# Altium PCB HW_ADHERENT_LANECTRL_R1.PcbDoc (part 2 of 2)
Units mm, origin at the board's own origin, x right, y up, seen from the top; angles counter-clockwise.
Board outline 504 x 60 mm, 4 copper layers (Top Layer, Int1 (GND), Int2 (PWR), Bottom Layer), stack 1.541 mm thick; 223 components, 129 nets, 646 pads, 0 vias.
Unrouted connection lines stored in the file: 353.
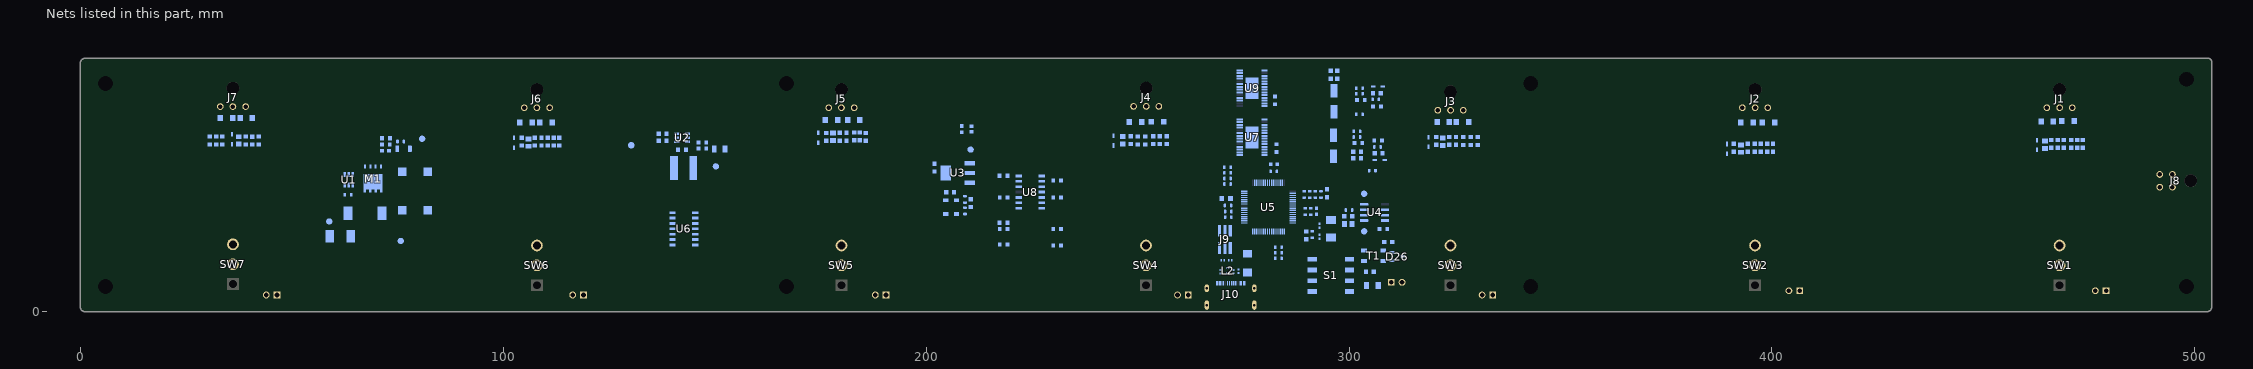
[diagram p2: the nets of this part, all layers, seen from the top]

## Part data
B1: manufacturer=MURATA, Manufacturer Part Name=BLM18PG121SN1D, Package Reference=F1206, Code=3030007, Family=BEAD, Supplier=Digikey, Supplier No=490-1037-2-ND
C1 C2 C3 C4 C5 C6 C7 C8 C9 C10 C11 C12 C13 C14 C29: library part CAP0603_100nF_50V, "0.1 µF ±10% 50V Ceramic Capacitor X7R 0603 (1608 Metric)", Manufacturer Name=KEMET, Manufacturer Part Number=C0603C104K5RAC7867, Datasheet Link=https://componentsearchengine.com/Datasheets/1/06031A100FAT2A.pdf, Height=0.9mm
C15 C16: library part EEEFT1H221AV, "220 µF 50 V Aluminum Electrolytic Capacitors Radial, Can - SMD 180mOhm @ 100kHz 2000 Hrs @ 105°C", Manufacturer Part Number=EEE-FT1H221AV, Package="RADIAL-2 Panasonic", Availability="In Stock", Check_prices=https://www.snapeda.com/parts/EEE-FT1H221AV/Panasonic/view-part/5517810/?ref=eda, MF="Panasonic Electronic Components", price=None, SnapEDA_Link=https://www.snapeda.com/parts/EEE-FT1H221AV/Panasonic/view-part/5517810/?ref=snap
C17: library part CAP0603_0.22UF_50V, "0.22 µF ±10% 50V Ceramic Capacitor X7R 0603 (1608 Metric)", Manufacturer Part Number=GCM188R71H224KA64D, Order Code="DIGI: 490-5402-2-ND"
C18: library part CAP1206_10UF_50V, "10 µF ±10% 50V Ceramic Capacitor X5R 1206 (3216 Metric)", LCSC Manufacturer Part Number=CL31A106KBHNNNE, LCSC Part Number=C13585, Manufacturer Part Number=CL31A106KBHNNNE, Order Code="Digi: 1276-2876-2-ND"
C19: library part CAP0603_0.1UF_50V_2, "0.1 µF ±10% 50V Ceramic Capacitor X7R 0603 (1608 Metric)", LCSC Manufacturer Part Number=CL10B104KB8NNNC, LCSC Part Number=C1591, Manufacturer Part Number=CL10B104KB8NNNL, Order Code=DIGI:1276-CL10B104KB8NNNLTR-ND, Sirius Stock Code=A063-AGC10300001226
C20 C27 C39 C47 C52: library part CAP0603_100nF, "0.1 µF ±10% 50V Ceramic Capacitor X7R 0603 (1608 Metric)", LCSC Part Number=C1590, Manufacturer Part Number=CL10B104KA8NNNC
C21: library part C0603C104M4RACTU, "0.1 µF ±20% 16V Ceramic Capacitor X7R 0603 (1608 Metric)", Manifacturer=KEMET, Supplier="Digi; 399-C0603C104M4RACTUDKR-ND"
C22: library part MSASU168SB5105MTNA01, "CAP CER 1UF 50V X5R 0603", manufacturer="Taiyo Yuden", Supplier=587-MSASU168SB5105MTNA01DKR-ND
C23: library part GRM188R72A104KA35D, "CAP CER 0.1UF 100V X7R 0603", Manifacturer="Murata Electronics", Supplier="Digi; 490-3285-6-ND"
C24: library part CAP1206_22uF_35V, "22 µF ±20% 35V Ceramic Capacitor X5R 1206 (3216 Metric)", Manufacturer Part Number=C3216X5R1V226M160AC, Order Code="DIGI : 445-180362-1-ND"
C25 C26: library part CAP0603_10uF_25V, "10 µF ±10% 25V Ceramic Capacitor X5R 0603 (1608 Metric)", Manufacturer Part Number=GRM188R61E106KA73J, Order Code="Digi; 490-GRM188R61E106KA73JDKR-ND"
C28: library part CAP0603_10UF_10V, "10 µF ±10% 10V Ceramic Capacitor X5R 0603 (1608 Metric)", LCSC Manufacturer Part Number=CL10A106KP8NNNC, LCSC Part Number=C19702, Manufacturer Part Number=CL10A106KP8NNNC, Order Code="DIGI: 1276-1192-2-ND"
C30 C31: library part CAP0603_100PF, "100 pF ±5% 50V Ceramic Capacitor C0G, NP0 0603 (1608 Metric)", LCSC Part Number=C14858, Manufacturer Part Number=CL10C101JB8NNNC
C32: library part CAP0603_4.7uF_10V, "4.7 µF ±20% 10V Ceramic Capacitor X5R 0603 (1608 Metric)", Manufacturer Name="Murata Electronics", Manufacturer Part Number=GRM185R61A475ME11D, Datasheet Link=https://componentsearchengine.com/Datasheets/1/06031A100FAT2A.pdf, Height=0.9mm
C33 C34 C35 C36 C40 C41: library part CAP0603_1UF_16V, "1 µF ±10% 16V Ceramic Capacitor X7R 0603 (1608 Metric)", Manufacturer Part Number=CGA3E1X7R1C105K080AC, Order Code="DIGI: 445-12539-2-ND"
C37 C38: library part GMC04CG8R2J25NT, "CAP0402 COG 8.2PF 5% 25V", Manifacturer="Cal-Chip Electronics, Inc.", Supplier="Digi; 4713-GMC04CG8R2J25NTDKR-ND"
C42: library part CAP0402_0.1UF_50V_1, "0.1 µF ±10% 50V Ceramic Capacitor X7R 0402 (1005 Metric)", Manufacturer Part Number=GCM155R71H104KE02J, Order Code="DIGI: 490-14514-2-ND"
C43 C49: "22 µF 50 V Aluminum - Polymer Capacitors Radial, Can - SMD 80mOhm 10000 Hrs @ 105°C", manufacturer="Panasonic Industry", MPN=EEH-ZA1H220P
C44 C45 C50 C51: library part CAP0603_100nF_1, "CAP CER 0.1UF 50V X7R 0603", Order Code="DIGI : 399-5089-1-ND", P/N=C0603C104K5RACTU
C46 C48: library part CAP0603_0.1uF_10V, "0.1 µF ±10% 10V Ceramic Capacitor X7R 0603 (1608 Metric)", Arrow Part Number=0603ZC104KAT2A, Manufacturer Name=AVX, Mouser Part Number=581-0603ZC104K, Arrow Price/Stock=https://www.arrow.com/en/products/0603zc104kat2a/avx, Datasheet Link=https://componentsearchengine.com/Datasheets/1/06031A100FAT2A.pdf, Height=0.9mm, Manufacturer Part Number=0603ZC104KAT2A, Mouser Price/Stock=https://www.mouser.co.uk/ProductDetail/AVX/0603ZC104KAT2A?qs=pf7pOjfHGZYfu9op9dQPDA%3D%3D
D1 D3 D7 D8 D13 D14 D19 D39 D40: "Diode 30 V 100mA Surface Mount SOD-323", MPN=BAT54WS-7-F, Supplier=C124205
D2 D4 D5 D6 D9 D10 D11 D12 D15 D16 D17 D18 D20 D21: "53.3V Clamp 3.8A Ipp Tvs Diode Surface Mount SOD-123F", manufacturer="Littelfuse Inc.", MPN=SMF33A
D22: "38.9V Clamp 77.1A Ipp Tvs Diode Surface Mount DO-214AB (SMCJ)", manufacturer="Littelfuse Inc.", MPN=SMDJ24CA
D23 D24: "Diode 20 V 500mA Surface Mount SOD-123"
D25: library part LED_1, "LED RED CLEAR SMD", manufacturer="Lite-On Inc.", Supplier Part Number=160-1447-1-ND, Manufacturer Part Number=LTST-C191KRKT
D26: library part SM24CANB-02HTG_TVS, "TVS DIODE 24VWM 50VC SOT23-3", LCSC Manufacturer Part Number=SM24CANB-02HTG, LCSC Part Number=C151237, Manufacturer Part Number=SM24CANB-02HTG, Order Code="DIGI : F6707CT-ND"
D27: library part LED0805_GREEN, "Green 570nm LED Indication - Discrete 2.1V 0805 (2012 Metric)", Color=Red, manufacturer="Everlight Electronics Co Ltd", Manufacturer Part Number=QTLP630C4TR, componentlink1description="Manufacturer URL", componentlink1url=http://www.we-online.com, componentlink2description=Datasheet, componentlink2url=http://katalog.we-online.com/led/datasheet/150080RS75000.pdf, PackageReference=0805_A
D28: library part LTST-C191KSKT, "Yellow 591nm LED Indication - Discrete 2.1V 0603 (1608 Metric)", Color="Yellow Clear", Manufacturer Part Number=LTST-C191KSKT, Order Code="DIGI: 160-1448-2-ND"
D36: "9.2V Clamp 43.5A Ipp Tvs Diode Surface Mount DO-214AC (SMA)", manufacturer="Littelfuse Inc.", MPN=SMAJ5.0A
D37 D38: library part RF2945-000, "10V (Typ) Clamp 2A (8/20µs) Ipp Tvs Diode Surface Mount 0402", Manufacturer Part Number=SESD0402X1BN-0010-098, Order Code="DIGI: SESD0402X1BN-0010-098TR-ND"
F1: "FUSE BRD MNT 5A 125VAC/VDC 2SMD", manufacturer=Littelfuse, Supplier="Digi; F2607DKR-ND"
FB1: "120 Ohms @ 100 MHz 1 Power Line Ferrite Bead 0805 (2012 Metric) 3A 30mOhm", MPN=BLM21PG121SN1D, Supplier="Digi; 490-5986-6-ND"
J1 J2 J3 J4 J5 J6 J7: "Micro-Fit 3.0 Right-Angle Header, 3.00mm Pitch, Single Row, 3 Circuits, with Snap-in Plastic Peg PCB Lock, Tin, Glow-Wire Capable, Black", Manufacturer Part Number=436500300, Supplier="Digi; WM1861-ND"
J8: "Connector Header Through Hole, Right Angle 4 position 0.118\" (3.00mm)", manufacturer=MOLEX, Manufacturer Part Number=0430450400, Supplier="Digi; WM1814-ND"
J9: "Connector Header Surface Mount 6 position 0.050\" (1.27mm)", manufacturer="Samtec Inc.", Supplier=SAM13919DKR-ND
J10: library part USB4510-03-1-A_REVA, "USB-C (USB TYPE-C) USB 2.0 Receptacle Connector 24 (16+8 Dummy) Position Board Edge, Cutout; Surface Mount; Through Hole, Right Angle", Manufacturer Part Number=USB4510-03-1-A, Order Code="DIGI: 2073-USB4510-03-1-ATR-ND"
L1: library part 74404064180, "18 µH Semi-Shielded Drum Core, Wirewound Inductor 2.2 A 81mOhm Nonstandard", Supplier=732-5553-6-ND
L2: library part MCZ1210AH900L2T, "2 Line Common Mode Choke Surface Mount 90 Ohms @ 100 MHz 100mA DCR 1.75Ohm", LCSC Manufacturer Part Number=MCZ1210AH900L2TD0G, LCSC Part Number=C435268, Manufacturer Part Number=MCZ1210AH900L2TA0G, Order Code="Digi: 445-MCZ1210AH900L2TA0GTR-ND"
LEDS1 LEDS2 LEDS3 LEDS4 LEDS5 LEDS6 LEDS7 P1: library part "Header 2", "CONN HEADER VERT 2POS 2.54MM", manufacturer=Molex, Supplier Part Number=WM4000-ND, Manufacturer Part Number=0022032021
M1: "MOSFET'ler N-Ch 60V 100A TDSON-8 OptiMOS 3"
MTG1 MTG2 MTG3 MTG4 MTG5 MTG6 MTG7 MTG8: library part MTG3MM_8
R1 R2 R3 R4 R11 R12 R13 R14 R21 R22 R23 R24 R27 R32: library part 0603WAF1002T5E, "Thick Film Resistors - SMD 0603 100 mW (1/10 W) 1% 10K", manufacturer="UNI-ROYAL(Uniroyal Elec)", Supplier_JLCPCB=C25804, Supplier_MOUSER=303-0603WAF1002T5E
R5 R6 R15 R16 R25 R26 R33: library part 0603WAF1003T5E, "-55℃~+155℃ 100kΩ 100mW 75V Thick Film Resistor ±1% ±100ppm/℃ 0603 Chip Resistor - Surface Mount ROHS", manufacturer="UNI-ROYAL(Uniroyal Elec)", Supplier_JLCPCB=C25803, Supplier_MOUSER=303-0603WAF1003T5E
R7 R9 R17 R20 R28 R30 R34: library part 0603WAF1502T5E, "-55℃~+155℃ 100mW 15kΩ 75V Thick Film Resistor ±1% ±100ppm/℃ 0603 Chip Resistor - Surface Mount ROHS", JLCPCB PART 3=C22809, manufacturer="UNI-ROYAL(Uniroyal Elec)", Mouser Part Number=303-0603WAF1502T5E
R8 R10 R18 R19 R29 R31 R35: library part 0805W8F1002T5E, "-55℃~+155℃ 10kΩ 125mW 150V Thick Film Resistor ±1% ±100ppm/℃ 0805 Chip Resistor - Surface Mount ROHS", JLCPCB PART#=C17414, manufacturer="UNI-ROYAL(Uniroyal Elec)"
R36: library part CMP-2100-03662-2, "RES SMD 100K OHM 1% 1/10W 0603", Case Code (Imperial)=0603, Case Code (Metric)=1608, Max Operating Temperature=155°C, Max Power Dissipation=100mW, Min Operating Temperature=-55°C, Resistance=100kR, Resistance Tolerance=1%, Resistor Type="Thick Film", Temperature Coefficient=100ppm/°C, Voltage Rating=50V, Working Voltage=75V, Case/Package=0603, Construction=Rectangular, Depth=0.8mm, Features="Moisture Resistant", Height=0.45mm, Lead Free="Lead Free", Length=1.6mm, Military Standard=Not, Number of Pins=2, Number of Terminations=2, packaging="Tape and Reel", Power Rating=100mW, REACH SVHC="No SVHC", RoHS Compliant=Yes, series=RC, Technology="THICK FILM", Termination=SMD/SMT, Tolerance=1%, Voltage Rating (DC)=50V, Width=0.8mm
R37 R44 R59 R66 R67 R70 R73 R76 R77 R78 R79: library part RES0603_10K_%1_1, "10 kOhms ±1% 0.125W, 1/8W Chip Resistor 0603 (1608 Metric) Anti-Sulfur Thin Film", LCSC Manufacturer Part Number=MCT06030C1002FP500, LCSC Part Number=C161803, Manufacturer Part Number=RNCP0603FTD10K0, Order Code="Digi: RNCP0603FTD10K0TR-ND"
R38: library part CRCW060388K7FKEA, "88.7 kOhms ±1% 0.125W, 1/8W Chip Resistor 0603 (1608 Metric) Automotive AEC-Q200 Thick Film"
R39: library part RC0603FR-0722K1L, "22.1 kOhms ±1% 0.1W, 1/10W Chip Resistor 0603 (1608 Metric) Moisture Resistant Thick Film"
R40: library part RES0603_22K_%1, "10 kOhms ±1% 0.1W, 1/10W Chip Resistor 0603 (1608 Metric) Moisture Resistant Thick Film", LCSC Manufacturer Part Number=RC0603FR-0722KL, LCSC Part Number=C114065, Manufacturer Part Number=RC0603FR-0722KL, Order Code="Digi: 311-22.0KHRTR-ND"
R41: library part RES0603_33K_%1, "33 kOhms ±1% 0.1W, 1/10W Chip Resistor 0603 (1608 Metric) Moisture Resistant Thick Film", LCSC Manufacturer Part Number=RC0603FR-0733KL, LCSC Part Number=C126359, Manufacturer Part Number=RC0603FR-0733KL, Order Code="Digi: 311-33.0KHRTR-ND"
R42: library part CRGH0603F330R, "RES SMD 330 OHM 1% 1/5W 0603", Device Package="0603 (1608 Metric)", manufacturer="TE Connectivity Passive Product", Operating Temperature="-55°C ~ 155°C", Power (Watts)="0.2W, 1/5W", Supplier Device Package=0603, Supplier Part Number 1=A129541CT-ND, Temperature Coefficient=±100ppm/°C, Tolerance=±1%, componentlink1description=Datasheet, componentlink1url=https://www.te.com/commerce/DocumentDelivery/DDEController?Action=srchrtrv&DocNm=1773204-1&DocType=DS&DocLang=English, componentlink2description="DigiKey Link", componentlink2url=https://www.digikey.com/en/products/detail/te-connectivity-passive-product/CRGH0603F330R/5586961, Composition="Thick Film", Height - Seated (Max)="0.022\" (0.55mm)", lastupdated="2/9/2024 8:43:33 PM", Lifecycle Status=Active, Minimum Order=1, Number of Terminations=2, Package / Case="0603 (1608 Metric)", packaging=TapeAndReel, Part Number=CRGH0603F330R, Part Status=Active, partid=5733, price=0.01, Resistance="330 Ohms", series="CRGH, Neohm", Size / Dimension="0.063\" L x 0.031\" W (1.60mm x 0.80mm)", Supplier 1=DigiKey
R43: library part AC1206FR-07120RL, "RES SMD 120 OHM 1% 1/4W 1206", Device Package="1206 (3216 Metric)", manufacturer=Yageo, Operating Temperature="-55°C ~ 155°C", Power (Watts)="0.25W, 1/4W", Ratings=AEC-Q200, Supplier Device Package=1206, Supplier Part Number 1=YAG3810CT-ND, Temperature Coefficient=±100ppm/°C, Tolerance=±1%, componentlink1description=Datasheet, componentlink1url=https://www.yageo.com/upload/media/product/productsearch/datasheet/rchip/PYu-AC_51_RoHS_L_7.pdf, componentlink2description="DigiKey Link", componentlink2url=https://www.digikey.com/en/products/detail/yageo/AC1206FR-07120RL/5897228, Composition="Thick Film", Features="Automotive AEC-Q200, Moisture Resistant", Height - Seated (Max)="0.026\" (0.65mm)", lastupdated="2/9/2024 8:54:27 PM", Lifecycle Status=Active, Minimum Order=1, Number of Terminations=2, Package / Case="1206 (3216 Metric)", packaging=TapeAndReel, Part Number=AC1206FR-07120RL, Part Status=Active, partid=31141, price=0.01, Resistance="120 Ohms", series=AC, Size / Dimension="0.122\" L x 0.063\" W (3.10mm x 1.60mm)", Supplier 1=DigiKey
R45 R46 R47: library part RES0603_10K_%1, "10 kOhms ±1% 0.1W, 1/10W Chip Resistor 0603 (1608 Metric) Moisture Resistant Thick Film", LCSC Manufacturer Part Number=RC0603FR-0710KL, LCSC Part Number=C98220, Manufacturer Part Number=RC0603FR-0710KL, Order Code="Digi: 311-10.0KHRTR-ND"
R48 R49: library part Res3_9, "RES SMD 1K OHM 1% 1/10W 0603", Case Code (Imperial)=0603, Case Code (Metric)=1608, manufacturer=Yageo, Manufacturer Part Number=RC0603FR-071KL, Max Operating Temperature=155°C, Max Power Dissipation=100mW, Min Operating Temperature=-55°C, Resistance=1kR, Resistance Tolerance=1%, Resistor Type="Thick Film", Supplier Part Number 1=311-1.00KHRCT-ND, Temperature Coefficient=100ppm/°C, Voltage Rating=50V, Case/Package=0603, Category="Chip SMD Resistors", componentlink1description=https://datasheet.ciiva.com/11819/0900766b80c66297-11819477.pdf?src-supplier=RSComponents, componentlink1url=https://datasheet.ciiva.com/11819/0900766b80c66297-11819477.pdf?src-supplier=RSComponents, componentlink2description=https://datasheet.ciiva.com/12666/pyu-rc0402-51-rohs-l-6-r-12666741.pdf?src-supplier=Mouser, componentlink2url=https://datasheet.ciiva.com/12666/pyu-rc0402-51-rohs-l-6-r-12666741.pdf?src-supplier=Mouser, ComponentLink3Description=https://datasheet.ciiva.com/17063/pyu-rc0402-51-rohs-l-6-r-17063193.pdf?src-supplier=Future+Electronics, ComponentLink3URL=https://datasheet.ciiva.com/17063/pyu-rc0402-51-rohs-l-6-r-17063193.pdf?src-supplier=Future+Electronics, ComponentLink4Description=https://datasheet.ciiva.com/22747/1018594-22747513.pdf?src-supplier=Element14, ComponentLink4URL=https://datasheet.ciiva.com/22747/1018594-22747513.pdf?src-supplier=Element14, ComponentLink5Description=https://datasheet.ciiva.com/7849/1018594-7849869.pdf?src-supplier=Element14, ComponentLink5URL=https://datasheet.ciiva.com/7849/1018594-7849869.pdf?src-supplier=Element14, ComponentLink6Description=https://datasheet.ciiva.com/7983/1018594-7983502.pdf?src-supplier=Element14, ComponentLink6URL=https://datasheet.ciiva.com/7983/1018594-7983502.pdf?src-supplier=Element14, ComponentLink7Description=https://datasheet.ciiva.com/7849/1018594-7849871.pdf?src-supplier=Element14, ComponentLink7URL=https://datasheet.ciiva.com/7849/1018594-7849871.pdf?src-supplier=Element14, ComponentLink8Description=https://datasheet.ciiva.com/11808/0900766b80c66297-11808195.pdf?src-supplier=RSComponents, ComponentLink8URL=https://datasheet.ciiva.com/11808/0900766b80c66297-11808195.pdf?src-supplier=RSComponents, ComponentLink9Description=https://datasheet.ciiva.com/2452/pyu-rc0402-51-rohs-l-6-2452608.pdf?src-supplier=Digi-Key, ComponentLink9URL=https://datasheet.ciiva.com/2452/pyu-rc0402-51-rohs-l-6-2452608.pdf?src-supplier=Digi-Key, ComponentLink10Description=https://datasheet.ciiva.com/2452/pyu-r-int-thick-7-2452609.pdf?src-supplier=Digi-Key, ComponentLink10URL=https://datasheet.ciiva.com/2452/pyu-r-int-thick-7-2452609.pdf?src-supplier=Digi-Key, ComponentLink11Description=https://datasheet.ciiva.com/2452/pyu-r-int-thick-7-2452610.pdf?src-supplier=Digi-Key, ComponentLink11URL=https://datasheet.ciiva.com/2452/pyu-r-int-thick-7-2452610.pdf?src-supplier=Digi-Key, ComponentLink12Description=https://datasheet.ciiva.com/28386/pyu-rc0402-51-rohs-l-6-28386633.pdf?src-supplier=Avnet+Europe, ComponentLink12URL=https://datasheet.ciiva.com/28386/pyu-rc0402-51-rohs-l-6-28386633.pdf?src-supplier=Avnet+Europe, ComponentLink13Description=https://datasheet.ciiva.com/22747/1018594-22747515.pdf?src-supplier=Element14, ComponentLink13URL=https://datasheet.ciiva.com/22747/1018594-22747515.pdf?src-supplier=Element14, ComponentLink14Description=https://datasheet.ciiva.com/7983/1018594-7983535.pdf?src-supplier=Element14, ComponentLink14URL=https://datasheet.ciiva.com/7983/1018594-7983535.pdf?src-supplier=Element14, ComponentLink15Description=https://datasheet.ciiva.com/8896/pyu-rc0402-51-rohs-l-6-8896201.pdf?src-supplier=Avnet, ComponentLink15URL=https://datasheet.ciiva.com/8896/pyu-rc0402-51-rohs-l-6-8896201.pdf?src-supplier=Avnet, ComponentLink16Description=https://datasheet.ciiva.com/15189/getdatasheetpartid-326379-15189533.pdf?src-supplier=Verical, ComponentLink16URL=https://datasheet.ciiva.com/15189/getdatasheetpartid-326379-15189533.pdf?src-supplier=Verical, Construction=Rectangular, Contact Plating=Tin,Matte, Depth=0.8mm, Features="Moisture Resistant", Height=0.45mm, Lead Free="Lead Free", Length=1.6mm, Military Standard=Not, Number of Terminations=2, packaging="Tape and Reel", Power Rating=100mW, Pricing 1="1=0,10000, 10=0,02400, 100=0,00970, 1000=0,00436, 2500=0,00378 (USD)", Radiation Hardening=No, REACH SVHC="No SVHC", RoHS=Yes, RoHS Compliant=Yes, series=RC, Size Code=0603, Stock 1=11977983, Supplier 1=Digi-Key, Technology="THICK FILM", Termination=SMD/SMT, Tolerance=1%
R50 R51 R52 R53 R54 R55 R56: library part RES0603_100R_%1_1, "100 Ohms ±1% 0.1W, 1/10W Chip Resistor 0603 (1608 Metric) Moisture Resistant Thick Film", LCSC Manufacturer Part Number=RC0603FR-07100RL, LCSC Part Number=C105588, Manufacturer Part Number=RC0603FR-07100RL, Order Code="Digi: 311-100HRTR-ND"
R57 R58: library part RES0402_5.1K_%1, "5.1 kOhms ±1% 0.063W, 1/16W Chip Resistor 0402 (1005 Metric) Automotive AEC-Q200 Thick Film", Manufacturer Part Number=CRCW04025K10FKED, Order Code="DIGI: 541-5.10KLTR-ND"
R60 R61 R63 R64 R68 R69 R72 R74: library part Res3_9_1, "RES SMD 4.7K OHM 1% 1/10W 0603", Case Code (Imperial)=0603, Case Code (Metric)=1608, manufacturer=Yageo, Manufacturer Part Number=RC0603FR-074K7L, Max Operating Temperature=155°C, Max Power Dissipation=100mW, Min Operating Temperature=-55°C, Resistance=4.7kR, Resistance Tolerance=1%, Resistor Type="Thick Film", Supplier Part Number 1=311-4.70KHRCT-ND, Temperature Coefficient=100ppm/°C, Voltage Rating=50V, Case/Package=0603, Category="Chip SMD Resistors", componentlink1description=https://datasheet.ciiva.com/11819/0900766b80c66297-11819477.pdf?src-supplier=RSComponents, componentlink1url=https://datasheet.ciiva.com/11819/0900766b80c66297-11819477.pdf?src-supplier=RSComponents, componentlink2description=https://datasheet.ciiva.com/12666/pyu-rc0402-51-rohs-l-6-r-12666741.pdf?src-supplier=Mouser, componentlink2url=https://datasheet.ciiva.com/12666/pyu-rc0402-51-rohs-l-6-r-12666741.pdf?src-supplier=Mouser, ComponentLink3Description=https://datasheet.ciiva.com/17063/pyu-rc0402-51-rohs-l-6-r-17063193.pdf?src-supplier=Future+Electronics, ComponentLink3URL=https://datasheet.ciiva.com/17063/pyu-rc0402-51-rohs-l-6-r-17063193.pdf?src-supplier=Future+Electronics, ComponentLink4Description=https://datasheet.ciiva.com/22747/1018594-22747513.pdf?src-supplier=Element14, ComponentLink4URL=https://datasheet.ciiva.com/22747/1018594-22747513.pdf?src-supplier=Element14, ComponentLink5Description=https://datasheet.ciiva.com/7849/1018594-7849869.pdf?src-supplier=Element14, ComponentLink5URL=https://datasheet.ciiva.com/7849/1018594-7849869.pdf?src-supplier=Element14, ComponentLink6Description=https://datasheet.ciiva.com/7983/1018594-7983502.pdf?src-supplier=Element14, ComponentLink6URL=https://datasheet.ciiva.com/7983/1018594-7983502.pdf?src-supplier=Element14, ComponentLink7Description=https://datasheet.ciiva.com/7849/1018594-7849871.pdf?src-supplier=Element14, ComponentLink7URL=https://datasheet.ciiva.com/7849/1018594-7849871.pdf?src-supplier=Element14, ComponentLink8Description=https://datasheet.ciiva.com/11808/0900766b80c66297-11808195.pdf?src-supplier=RSComponents, ComponentLink8URL=https://datasheet.ciiva.com/11808/0900766b80c66297-11808195.pdf?src-supplier=RSComponents, ComponentLink9Description=https://datasheet.ciiva.com/2452/pyu-rc0402-51-rohs-l-6-2452608.pdf?src-supplier=Digi-Key, ComponentLink9URL=https://datasheet.ciiva.com/2452/pyu-rc0402-51-rohs-l-6-2452608.pdf?src-supplier=Digi-Key, ComponentLink10Description=https://datasheet.ciiva.com/2452/pyu-r-int-thick-7-2452609.pdf?src-supplier=Digi-Key, ComponentLink10URL=https://datasheet.ciiva.com/2452/pyu-r-int-thick-7-2452609.pdf?src-supplier=Digi-Key, ComponentLink11Description=https://datasheet.ciiva.com/2452/pyu-r-int-thick-7-2452610.pdf?src-supplier=Digi-Key, ComponentLink11URL=https://datasheet.ciiva.com/2452/pyu-r-int-thick-7-2452610.pdf?src-supplier=Digi-Key, ComponentLink12Description=https://datasheet.ciiva.com/28386/pyu-rc0402-51-rohs-l-6-28386633.pdf?src-supplier=Avnet+Europe, ComponentLink12URL=https://datasheet.ciiva.com/28386/pyu-rc0402-51-rohs-l-6-28386633.pdf?src-supplier=Avnet+Europe, ComponentLink13Description=https://datasheet.ciiva.com/22747/1018594-22747515.pdf?src-supplier=Element14, ComponentLink13URL=https://datasheet.ciiva.com/22747/1018594-22747515.pdf?src-supplier=Element14, ComponentLink14Description=https://datasheet.ciiva.com/7983/1018594-7983535.pdf?src-supplier=Element14, ComponentLink14URL=https://datasheet.ciiva.com/7983/1018594-7983535.pdf?src-supplier=Element14, ComponentLink15Description=https://datasheet.ciiva.com/8896/pyu-rc0402-51-rohs-l-6-8896201.pdf?src-supplier=Avnet, ComponentLink15URL=https://datasheet.ciiva.com/8896/pyu-rc0402-51-rohs-l-6-8896201.pdf?src-supplier=Avnet, ComponentLink16Description=https://datasheet.ciiva.com/15189/getdatasheetpartid-326379-15189533.pdf?src-supplier=Verical, ComponentLink16URL=https://datasheet.ciiva.com/15189/getdatasheetpartid-326379-15189533.pdf?src-supplier=Verical, ComponentLink17Description=https://datasheet.ciiva.com/11808/0900766b80f96399-11808081.pdf?src-supplier=RSComponents, ComponentLink17URL=https://datasheet.ciiva.com/11808/0900766b80f96399-11808081.pdf?src-supplier=RSComponents, ComponentLink18Description=https://datasheet.ciiva.com/7746/1686128-7746280.pdf?src-supplier=Element14, ComponentLink18URL=https://datasheet.ciiva.com/7746/1686128-7746280.pdf?src-supplier=Element14, ComponentLink19Description=https://datasheet.ciiva.com/7660/1868787-7660790.pdf?src-supplier=Element14, ComponentLink19URL=https://datasheet.ciiva.com/7660/1868787-7660790.pdf?src-supplier=Element14, ComponentLink20Description=https://datasheet.ciiva.com/7983/443971-7983613.pdf?src-supplier=Element14, ComponentLink20URL=https://datasheet.ciiva.com/7983/443971-7983613.pdf?src-supplier=Element14, ComponentLink21Description=https://datasheet.ciiva.com/7746/1738695-7746281.pdf?src-supplier=Element14, ComponentLink21URL=https://datasheet.ciiva.com/7746/1738695-7746281.pdf?src-supplier=Element14, ComponentLink22Description=https://datasheet.ciiva.com/7746/1738695-7746279.pdf?src-supplier=Element14, ComponentLink22URL=https://datasheet.ciiva.com/7746/1738695-7746279.pdf?src-supplier=Element14, ComponentLink23Description=https://datasheet.ciiva.com/8896/pyu-rc0603-51-rohs-l-4-8896106.pdf?src-supplier=Avnet, ComponentLink23URL=https://datasheet.ciiva.com/8896/pyu-rc0603-51-rohs-l-4-8896106.pdf?src-supplier=Avnet, ComponentLink24Description=https://datasheet.ciiva.com/15189/getdatasheetpartid-404327-15189644.pdf?src-supplier=Verical, ComponentLink24URL=https://datasheet.ciiva.com/15189/getdatasheetpartid-404327-15189644.pdf?src-supplier=Verical, ComponentLink25Description=https://datasheet.ciiva.com/28386/pyu-rc0603-51-rohs-l-4-28386648.pdf?src-supplier=Avnet+Europe, ComponentLink25URL=https://datasheet.ciiva.com/28386/pyu-rc0603-51-rohs-l-4-28386648.pdf?src-supplier=Avnet+Europe, ComponentLink26Description=https://datasheet.ciiva.com/25906/pyu-rc0603-51-rohs-l-4-25906933.pdf?src-supplier=Avnet+Europe, ComponentLink26URL=https://datasheet.ciiva.com/25906/pyu-rc0603-51-rohs-l-4-25906933.pdf?src-supplier=Avnet+Europe, ComponentLink27Description=https://datasheet.ciiva.com/15189/getdatasheetpartid-422754-15189760.pdf?src-supplier=Verical, ComponentLink27URL=https://datasheet.ciiva.com/15189/getdatasheetpartid-422754-15189760.pdf?src-supplier=Verical, ComponentLink28Description=https://datasheet.ciiva.com/22747/443971-22747528.pdf?src-supplier=Element14, ComponentLink28URL=https://datasheet.ciiva.com/22747/443971-22747528.pdf?src-supplier=Element14, ComponentLink29Description=https://datasheet.ciiva.com/7660/38590-7660794.pdf?src-supplier=Element14, ComponentLink29URL=https://datasheet.ciiva.com/7660/38590-7660794.pdf?src-supplier=Element14, ComponentLink30Description=https://datasheet.ciiva.com/7746/1868787-7746365.pdf?src-supplier=Element14, ComponentLink30URL=https://datasheet.ciiva.com/7746/1868787-7746365.pdf?src-supplier=Element14, ComponentLink31Description=https://datasheet.ciiva.com/46440/1868787-46440909.pdf?src-supplier=Element14, ComponentLink31URL=https://datasheet.ciiva.com/46440/1868787-46440909.pdf?src-supplier=Element14, ComponentLink32Description=https://datasheet.ciiva.com/7746/1738695-7746366.pdf?src-supplier=Element14, ComponentLink32URL=https://datasheet.ciiva.com/7746/1738695-7746366.pdf?src-supplier=Element14, Construction=Rectangular, Depth=0.8mm, Features="Moisture Resistant", Height=0.45mm, Lead Free="Lead Free", Lead Pitch=0.3mm, Length=1.6mm, Military Standard=Not, Number of Pins=2, Number of Terminations=2, packaging="Tape and Reel", Power Rating=100mW, Pricing 1="1=0,10000, 10=0,02400, 100=0,00970, 1000=0,00436, 2500=0,00378 (USD)", REACH SVHC="No SVHC", RoHS=Yes, RoHS Compliant=Yes, series=RC, Size Code=0603, Stock 1=1306882, Supplier 1=Digi-Key, Termination=SMD/SMT, Tolerance=1%, Voltage Rating (DC)=50V, Width=0.8mm
R62 R71: library part 0603WAF1201T5E, "-55℃~+155℃ 1.2kΩ 100mW 75V Thick Film Resistor ±1% ±100ppm/℃ 0603 Chip Resistor - Surface Mount ROHS", JLCPCB PART#=C22765, Manifacturer="UNI-ROYAL(Uniroyal Elec)"
R65 R75: library part 0603WAF6040T5E, "-55℃~+155℃ 100mW 604Ω 75V Thick Film Resistor ±1% ±100ppm/℃ 0603 Chip Resistor - Surface Mount ROHS"
S1: "Dip Switch, 0.025A, 24Vdc, 4 Pos, Smd Rohs Compliant: Yes", manufacturer="Wurth Electronics", Supplier Part Number 1=732-6963-2-ND, Category="DIP Switches", componentlink1description=https://katalog.we-online.de/em/datasheet/4181212708xx.pdf?src-supplier=Digikey, componentlink1url=https://katalog.we-online.de/em/datasheet/4181212708xx.pdf?src-supplier=Digikey, Manufacturer Part Number=418121270804, Pricing 1="800=1.456 (USD)", RoHS=Yes, Stock 1=5600, Supplier 1=Digikey
SW1 SW2 SW3 SW4 SW5 SW6 SW7: "Rocker Switch SPDT 0.4VA (AC/DC) 20 V Through Hole", manufacturer=E-Switch, MPN=300SP1J1BLKM2RE, Supplier="Dıgı; EG4312-ND"
T1: "Ind Common Mode Filter Wirewound 51uH 2KOhm -30% to 50% 100KHz 200mA 1812 T/R", Case Code (Imperial)=1812, Current=200mA, DC Resistance (DCR)=1R, Inductance=51uH, Insulation Resistance=10MR, LCSC Manufacturer Part Number=ACT45B-510-2P-TL003, LCSC Part Number=C76584, manufacturer=TDK, Max Operating Temperature=150°C, Min Operating Temperature=-40°C, Package Quantity=2000, Self Resonant Frequency=10MHz, Supplier Part Number 1=445-3958-1-ND, Tolerance=50%, Voltage Rating=50V, Case/Package=1812, Category="Fixed Inductors", componentlink1description=https://datasheet.ciiva.com/22726/1649098-22726290.pdf?src-supplier=Element14, componentlink1url=https://datasheet.ciiva.com/22726/1649098-22726290.pdf?src-supplier=Element14, componentlink2description=https://datasheet.ciiva.com/26793/act45b-510-2p-tl003-26793344.pdf?src-supplier=IIIC, componentlink2url=https://datasheet.ciiva.com/26793/act45b-510-2p-tl003-26793344.pdf?src-supplier=IIIC, ComponentLink3Description=https://datasheet.ciiva.com/8498/e9711-act-8498633.pdf?src-supplier=Avnet, ComponentLink3URL=https://datasheet.ciiva.com/8498/e9711-act-8498633.pdf?src-supplier=Avnet, ComponentLink4Description=https://datasheet.ciiva.com/1007/e9711-act-1007931.pdf?src-supplier=Digi-Key, ComponentLink4URL=https://datasheet.ciiva.com/1007/e9711-act-1007931.pdf?src-supplier=Digi-Key, ComponentLink5Description=https://datasheet.ciiva.com/15191/getdatasheetpartid-349822-15191803.pdf?src-supplier=Verical, ComponentLink5URL=https://datasheet.ciiva.com/15191/getdatasheetpartid-349822-15191803.pdf?src-supplier=Verical, ComponentLink6Description=https://datasheet.ciiva.com/1007/e9711-act-1007932.pdf?src-supplier=Digi-Key, ComponentLink6URL=https://datasheet.ciiva.com/1007/e9711-act-1007932.pdf?src-supplier=Digi-Key, ComponentLink7Description=https://datasheet.ciiva.com/1007/e9711-act-1007933.pdf?src-supplier=Digi-Key, ComponentLink7URL=https://datasheet.ciiva.com/1007/e9711-act-1007933.pdf?src-supplier=Digi-Key, ComponentLink8Description=https://datasheet.ciiva.com/7649/1833202-7649183.pdf?src-supplier=Element14, ComponentLink8URL=https://datasheet.ciiva.com/7649/1833202-7649183.pdf?src-supplier=Element14, Core Material=Ferrite, Current Rating=200mA, DC Current=200mA, Depth=3.4mm, Element Configuration=Dual, Height=2.8mm, Impedance=2.8kR, Lead Free="Lead Free", Length=4.7mm, Manufacturer Part Number=ACT45B-510-2P-TL003, Max DC Current=200mA, Military Standard=Not, Mount="Surface Mount", Number of Lines=2, Number of Pins=4, packaging="Tape and Reel", Pricing 1="1=1,95000, 10=1,80000, 25=1,65000, 50=1,41000, 100=1,26000, 250=1,08000, 500=1,02000, 1000=0,93000 (USD)", Radiation Hardening=No, REACH SVHC="No SVHC", RoHS=Yes, Stock 1=75821, Supplier 1=Digi-Key, Termination=SMD/SMT, Test Frequency=10MHz, Voltage Rating (DC)=50V, Width=3.2mm
TP1 TP2 TP3 TP4 TP5 TP6 TP7 TP8: library part "TEST PAD SMT 10MIL X 20MIL", DNP=DNP
U1: "OR Controller N+1 ORing Controller N-Channel 1:1 SOT-23-6"
U2: "Buck Switching Regulator IC Positive Adjustable 1V 1 Output 1A SOT-23-6", MPN=LMR50410XDBVR, Supplier=296-LMR50410XDBVRDKR-ND
U3: "Linear Voltage Regulator IC Positive Fixed 1 Output 1A SOT-223-3L", manufacturer=UMW, Supplier=C347222
U4: "3.3-V CAN Transceiver with Sleep Mode", MPN=SN65HVD231QDR, Supplier="Digi; 296-48950-6-ND"
U5: "ARM® Cortex®-M0+ STM32G0 Microcontroller IC 32-Bit 64MHz 512KB (512K x 8) FLASH 64-LQFP (10x10)", MPN=STM32G0B1RET6, Supplier=497-STM32G0B1RET6-ND
U6 U8: "AND Gate IC 4 Channel Schmitt Trigger Input 14-SOIC", MPN=SN74HCS08DR
U7 U9: "40-V, 160-mΩ, 4-ch automotive smart high-side switch with adjustable current limit", MPN=TPS4H160-Q1, Supplier=595-TPS4H160BQPWPRQ1
Y1: "CRYSTAL 8.0000MHZ 8PF SMD", manufacturer="ESC Inc.", Supplier="Digi; XC3144DKR-ND"

## Nets (pads, with @x,y where several pads share a name; then routed paths per layer and width w, separated by ;. In a path a pad name is that pad's centre, name@x,y a point inside that pad or via, vN(x,y) a via of type N, cw(c..) or ccw(c..) an arc to the next point about the centre after c; other vN are vias at no path point)
+3V3: B1.1 C25.2 C32.2 C33.2 C34.2 C35.2 C36.2 C46.2 C48.2 D1.1 D3.1 D7.1 D8.1 D13.1 D14.1 D19.1 D39.1 D40.1 FB1.2 J9.01 R42.1 R44.1 R45.2 R46.2 R59.1 R66.1 SW1.2 SW2.2 SW3.2 SW4.2 SW5.2 SW6.2 SW7.2 TP6.1 U3.2 U3.4 U5.6 U5.8 U6.14 U8.14
+5V_BUCK: C24.2 D23.A L1.2 R38.2 TP5.1
+24V_PR: C15.1 C16.1 C18.2 C19.2 M1.D R36.2 TP2.1 U1.4
+24V_VIN: F1.1 J8.1 TP1.1
CAN_N: C30.2 D26.2 J8.4 P1.2 T1.3
CAN_P: C31.2 D26.1 J8.3 R43.1 T1.4
CAN_RS: R44.2 U4.8 U5.42
CAN_RX: TP8.1 U4.4 U5.62
CAN_TX: TP7.1 U4.1 U5.63
DRIVER_CS1: R64.2 R65.2 U7.10
DRIVER_CS2: R72.2 R75.2 U9.10
DRV_CS1: C47.2 D39.2 R64.1 U5.23
DRV_CS2: C52.2 D40.2 R72.1 U5.24
DRV_DIAG_EN1: R63.2 U5.17
DRV_DIAG_EN2: R74.2 U5.18
DRV_FAULT1: R59.2 U5.25 U7.9
DRV_FAULT2: R66.2 U5.26 U9.9
DRV_SEH1: R60.2 U5.19
DRV_SEH2: R68.2 U5.37
DRV_SEL1: R61.2 U5.20
DRV_SEL2: R69.2 U5.21
EN_LANE1: R67.2 U5.30 U6.2
EN_LANE2: R70.2 U5.31 U6.5
EN_LANE3: R73.2 U5.32 U6.10
EN_LANE4: R76.2 U5.33 U6.13
EN_LANE5: R77.2 U5.34 U8.2
EN_LANE6: R78.2 U5.35 U8.5
EN_LANE7: R79.2 U5.40 U8.10
GND: C1.1 C2.1 C3.1 C4.1 C5.1 C6.1 C7.1 C8.1 C9.1 C10.1 C11.1 C12.1 C13.1 C14.1 C15.2 C16.2 C18.1 C19.1 C20.1 C22.1 C23.1 C24.1 C25.1 C26.1 C27.1 C28.1 C29.1 C30.1 C31.1 C32.1 C33.1 C34.1 C35.1 C36.1 C37.1 C38.1 C39.1 C40.1 C41.1 C42.1 C43.2 C44.1 C45.1 C46.1 C47.1 C48.1 C49.2 C50.1 C51.1 C52.1 D2.2 D4.2 D5.2 D6.2 D9.2 D10.2 D11.2 D12.2 D15.2 D16.2 D17.2 D18.2 D20.2 D21.2 D22.2 D25.2 D26.3 D27.1 D28.1 D36.1 D37.1 D38.1 J1.2 J2.2 J3.2 J4.2 J5.2 J6.2 J7.2 J8.2 J9.03 J9.05 J10.A1_B12 J10.B1_A12 J10.S1 J10.S2 J10.S3 J10.S4 LEDS1.2 LEDS2.2 LEDS3.2 LEDS4.2 LEDS5.2 LEDS6.2 LEDS7.2 R3.1 R4.2 R7.1 R8.1 R9.1 R10.1 R13.1 R14.1 R17.1 R18.1 R19.1 R20.1 R23.2 R24.1 R28.1 R29.1 R30.1 R31.1 R32.2 R34.1 R35.1 R37.1 R39.1 R41.1 R47.1 R57.2 R58.2 R62.1 R65.1 R67.1 R70.1 R71.1 R73.1 R75.1 R76.1 R77.1 R78.1 R79.1 S1.1 S1.2 S1.3 S1.4 TP3.1 U1.2 U2.2 U3.1 U4.2 U5.9 U6.7 U7.1 U7.12 U7.13 U7.29 U8.7 U8.12 U8.13 U9.1 U9.6 U9.12 U9.13 U9.29
LANE1_LED: R50.1 U5.27
LANE1_SIG: C3.2 D1.2 R5.1 R7.2 U5.13
LANE2_LED: R51.1 U5.28
LANE2_SIG: C4.2 D3.2 R6.1 R9.2 U5.14
LANE3_LED: R52.1 U5.29
LANE3_SIG: C7.2 D7.2 R15.1 R17.2 U5.15
LANE4_LED: R53.1 U5.57
LANE4_SIG: C8.2 D8.2 R16.1 R20.2 U5.16
LANE5_LED: R54.1 U5.58
LANE5_SIG: C11.2 D13.2 R25.1 R28.2 U5.38
LANE6_LED: R55.1 U5.59
LANE6_SIG: C12.2 D14.2 R26.1 R30.2 U5.39
LANE7_LED: R56.1 U5.60
LANE7_SIG: C14.2 D19.2 R33.1 R34.2 U5.48
LANE_IN1: U6.3 U7.3
LANE_IN2: U6.6 U7.4
LANE_IN3: U6.8 U7.5
LANE_IN4: U6.11 U7.6
LANE_IN5: U8.3 U9.3
LANE_IN6: U8.6 U9.4
LANE_IN7: U8.8 U9.5
LANE_OUT1: D2.1 J1.1 U7.27 U7.28
LANE_OUT2: D4.1 J2.1 U7.25 U7.26
LANE_OUT3: D9.1 J3.1 U7.17 U7.18
LANE_OUT4: D10.1 J4.1 U7.15 U7.16
LANE_OUT5: D15.1 J5.1 U9.27 U9.28
LANE_OUT6: D16.1 J6.1 U9.25 U9.26
LANE_OUT7: D20.1 J7.1 U9.17 U9.18
LED_CAN: R49.1 U5.61
LED_STAT: R48.1 U5.47
NetC17_1: C17.1 U1.1
NetC17_2: C17.2 D22.1 F1.2 M1.S U1.3 U1.6
NetC21_1: C21.1 U2.1
NetC21_2: C21.2 L1.1 U2.6
NetC26_2: C26.2 D23.C D24.C U3.3
NetC28_2: C28.2 C29.2 FB1.1 U4.3
NetD5_1: D5.1 J1.3 R5.2 R8.2
NetD6_1: D6.1 J2.3 R6.2 R10.2
NetD11_1: D11.1 J3.3 R15.2 R18.2
NetD12_1: D12.1 J4.3 R16.2 R19.2
NetD17_1: D17.1 J5.3 R25.2 R29.2
NetD18_1: D18.1 J6.3 R26.2 R31.2
NetD21_1: D21.1 J7.3 R33.2 R35.2
NetD25_1: D25.1 R42.2
NetD27_2: D27.2 R48.2
NetD28_2: D28.2 R49.2
NetJ10_A5: J10.A5 R57.1
NetJ10_A6: J10.A6 J10.B6 L2.1
NetJ10_A7: J10.A7 J10.B7 L2.2
NetJ10_B5: J10.B5 R58.1
NetLEDS1_1: LEDS1.1 R50.2
NetLEDS2_1: LEDS2.1 R51.2
NetLEDS3_1: LEDS3.1 R52.2
NetLEDS4_1: LEDS4.1 R53.2
NetLEDS5_1: LEDS5.1 R54.2
NetLEDS6_1: LEDS6.1 R55.2
NetLEDS7_1: LEDS7.1 R56.2
NetM1_G: M1.G U1.5
NetP1_1: P1.1 R43.2
NetR1_1: R1.1 R3.2 SW1.3
NetR2_1: R2.1 R4.1 SW2.3
NetR11_2: R11.2 R13.2 SW3.3
NetR12_2: R12.2 R14.2 SW4.3
NetR21_2: R21.2 R23.1 SW5.3
NetR22_1: R22.1 R24.2 SW6.3
NetR27_1: R27.1 R32.1 SW7.3
NetR38_1: R38.1 R39.2 U2.3
NetR60_1: R60.1 U7.7
NetR61_1: R61.1 U7.8
NetR62_2: R62.2 U7.11
NetR63_1: R63.1 U7.14
NetR68_1: R68.1 U9.7
NetR69_1: R69.1 U9.8
NetR71_2: R71.2 U9.11
NetR74_1: R74.1 U9.14
NetS1_5: S1.5 U5.2
NetS1_6: S1.6 U5.3
NetS1_7: S1.7 U5.4
NetS1_8: S1.8 U5.5
NetT1_1: T1.1 U4.7
NetT1_2: T1.2 U4.6
NRST: C39.2 J9.06 R46.1 U5.12
OSC_IN: C37.2 U5.10 Y1.1
OSC_OUT: C38.2 U5.11 Y1.2
SW_LANE1: C1.2 R1.2 U5.50 U6.1
SW_LANE2: C2.2 R2.2 U5.51 U6.4
SW_LANE3: C5.2 R11.1 U5.52 U6.9
SW_LANE4: C6.2 R12.1 U5.53 U6.12
SW_LANE5: C9.2 R21.1 U5.54 U8.1
SW_LANE6: C10.2 R22.2 U5.55 U8.4
SW_LANE7: C13.2 R27.2 U5.56 U8.9
SWCLK/BOOT: J9.04 R45.1 R47.2 U5.46
SWDIO: J9.02 U5.45
USB_N: D37.2 L2.3 U5.43
USB_P: D38.2 L2.4 U5.44
USB_VBUS_DET: C27.2 R40.1 R41.2 U5.36
VBUS: C42.2 D24.A D36.2 J10.A4_B9 J10.B4_A9 R40.2
VM: C22.2 C23.2 C43.1 C44.2 C45.2 C49.1 C50.2 C51.2 TP4.1 U2.4 U2.5 U7.20 U7.21 U7.22 U7.23 U9.20 U9.21 U9.22 U9.23
VM_SENSE: C20.2 R36.1 R37.2 U5.22
VREF: B1.2 C40.2 C41.2 U5.7
pads on no net: J1.4 J2.4 J3.4 J4.4 J5.4 J6.4 J7.4 J8. J10.A8 J10.B8 MTG1.0 MTG2.0 MTG3.0 MTG4.0 MTG5.0 MTG6.0 MTG7.0 MTG8.0 SW1.1 SW2.1 SW3.1 SW4.1 SW5.1 SW6.1 SW7.1 U4.5 U5.1 U5.41 U5.49 U5.64 U7.2 U7.19 U7.24 U8.11 U9.2 U9.15 U9.16 U9.19 U9.24

## Silkscreen, mask and mechanical layers (free items; w line width, h text height)
Mechanical 1:
  lines w0.013: 0,1.27 ccw(c1.27,1.27) 1.27,0 502,0 502.73,0 ccw(c502.73,1.27) 504,1.27 504,2 504,58 504,59 ccw(c503,59) 503,60 396,60 123,60 2,60 1.27,60 ccw(c1.27,58.73) 0,58.73 0,11 0,1.27
  lines w0.254: 506.492,1.524 507,0 ; 506.492,58.476 507,60 ; 506.746,0 507.254,0 ; 506.746,60 507.254,60 ; 507,24.896 507,0 ; 507,35.104 507,60 ; 507.508,1.524 507,0 ; 507.508,58.476 507,60
  text "60 (mm)" at 507.914,25.15 h1.52 r90

## Dimensions
0,61 to 504,64 on Mechanical 1

## Text inside footprints (layer, text, board x,y; h text height)
J10: Bottom Designator "PCB Edge" at 265.777,0 h0.64